# Altium PCB Rackmount_DSP.PcbDoc (part 20 of 24)
Units mil, origin at the board's own origin, x right, y up, seen from the top; angles counter-clockwise.
Board outline 10629.92 x 8267.72 mil, 4 copper layers (Top Layer, Mid Layer 1, Mid Layer 2, Bottom Layer), stack 36.2 mil thick; 4500 components, 1565 nets, 9765 pads, 3289 vias.
Unrouted connection lines stored in the file: 1.
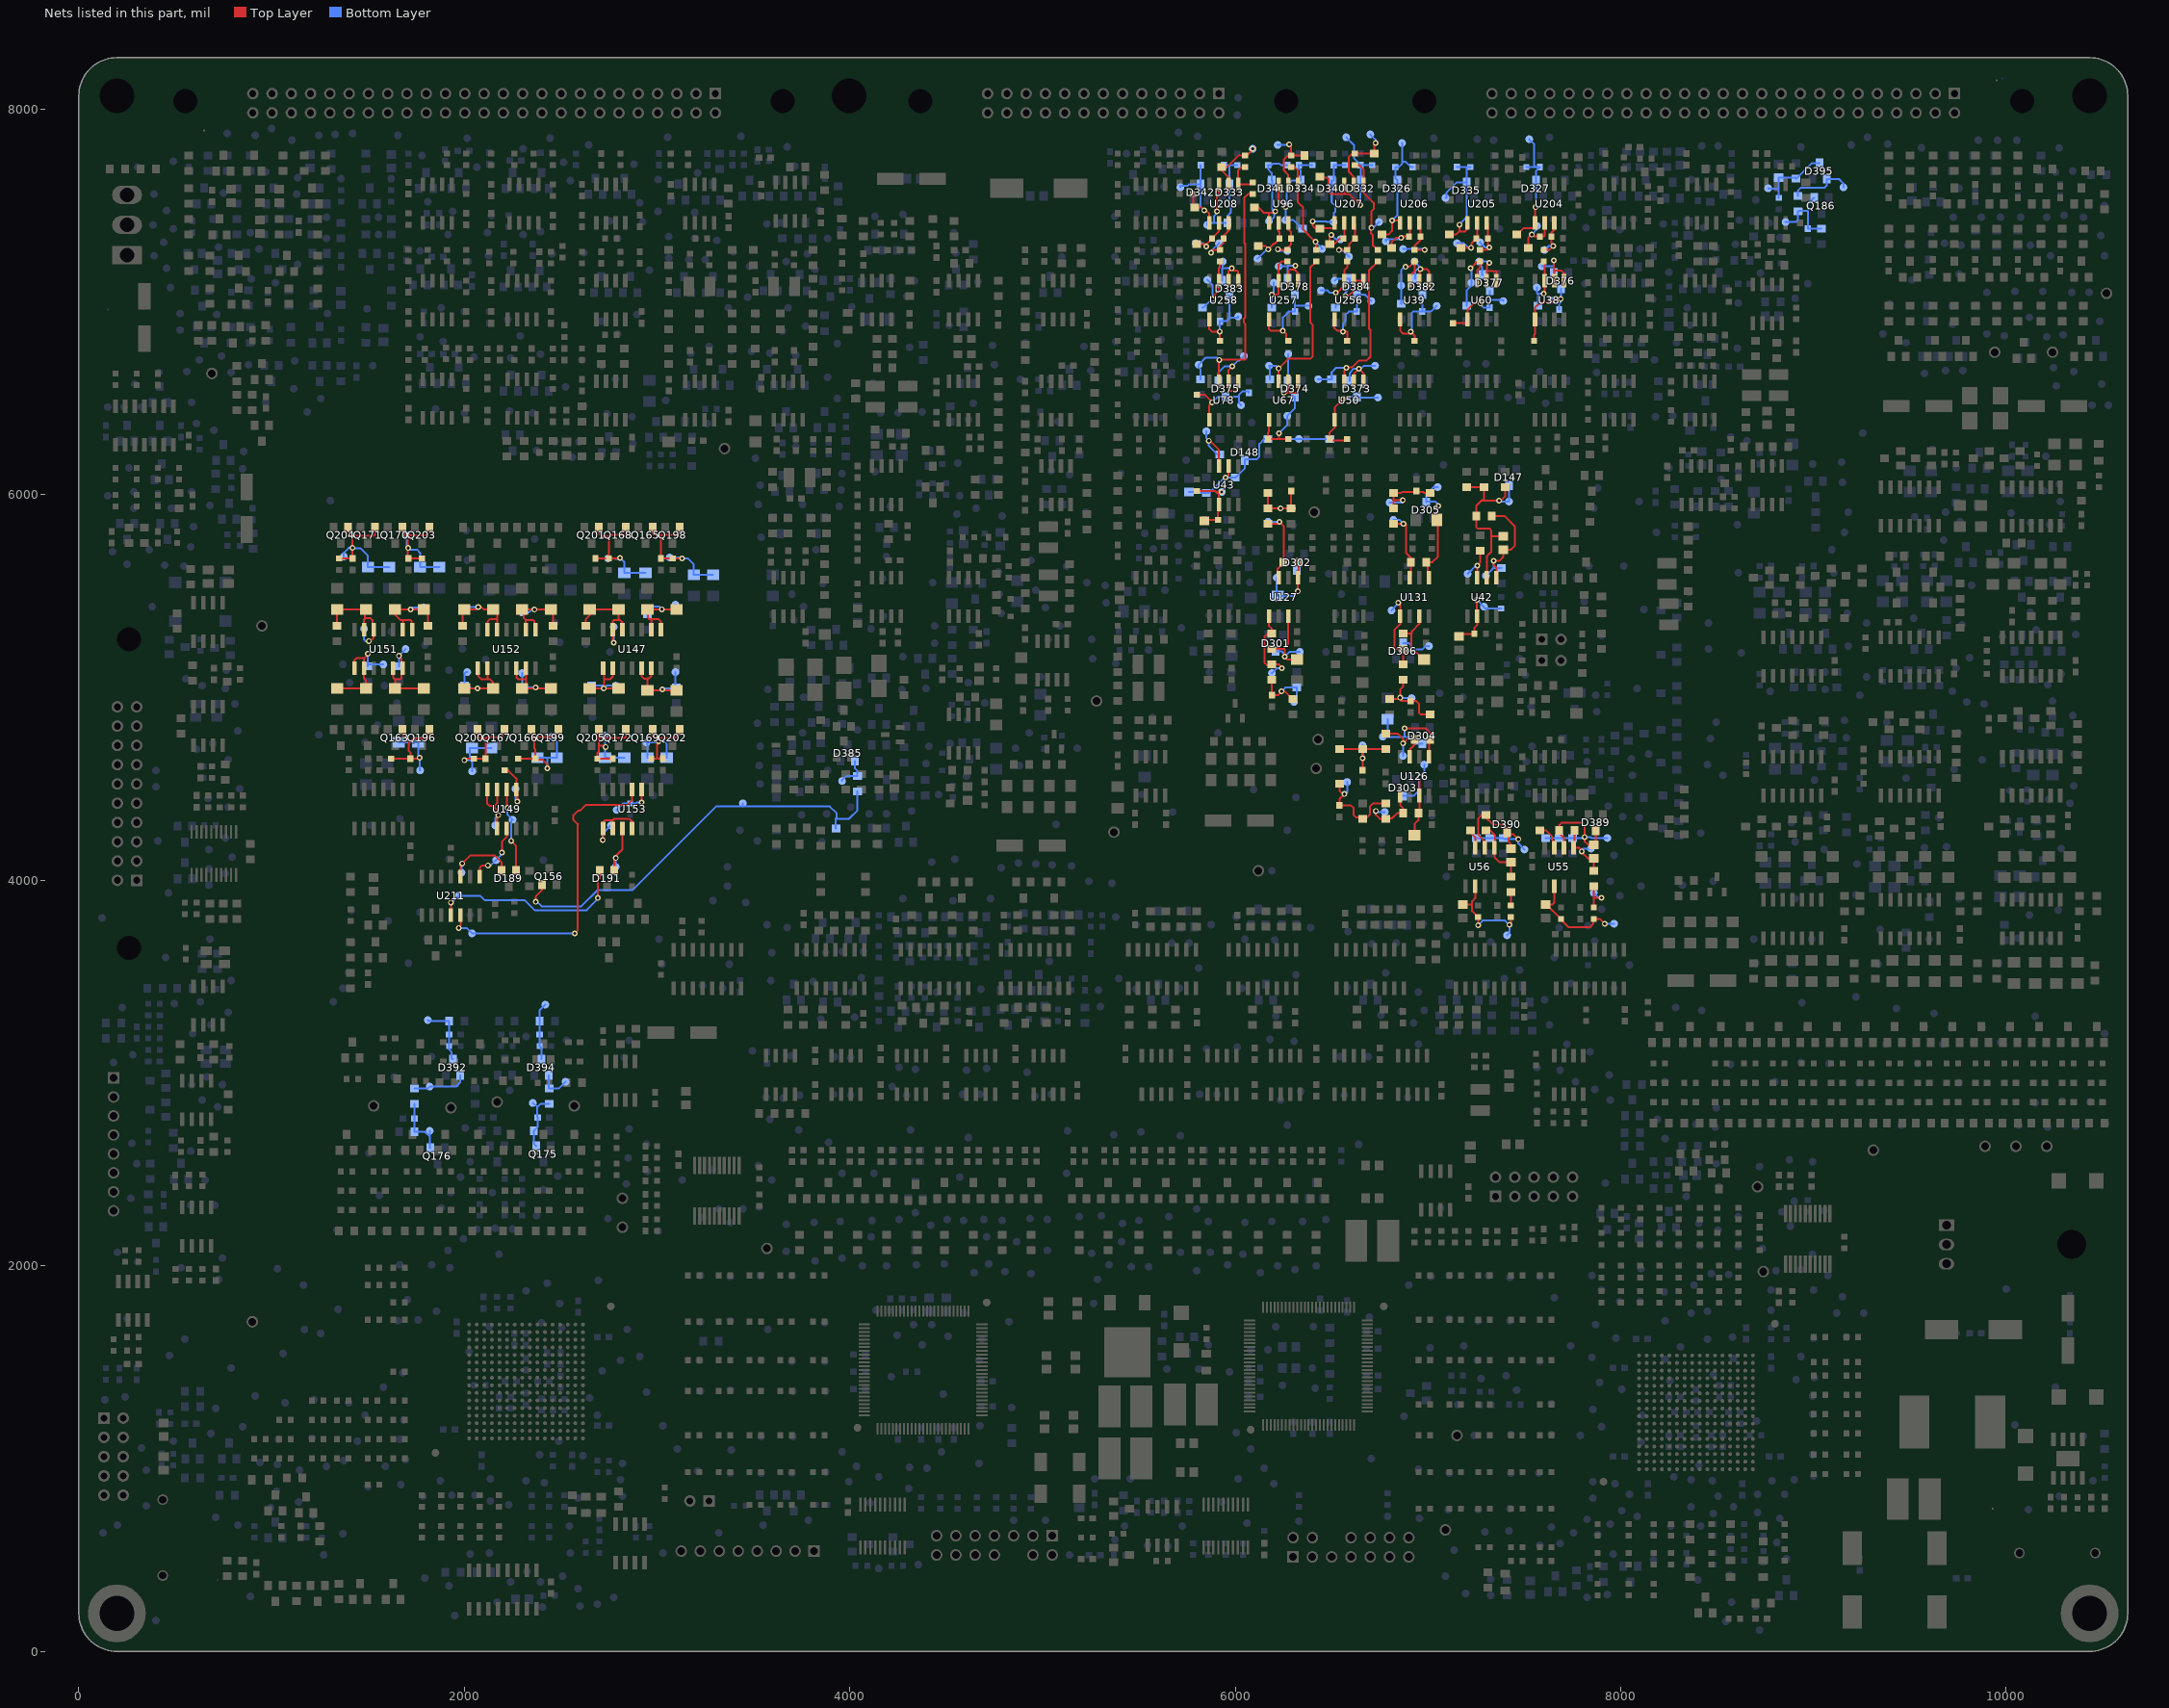
[diagram p22: the nets of this part, all layers, seen from the top]

## Via types
v1: diameter 30, hole 16, Top Layer to Bottom Layer, 3143 vias
v2: diameter 22, hole 12, Top Layer to Bottom Layer, 146 vias

## Nets (pads, with @x,y where several pads share a name; then routed paths per layer and width w, separated by ;. In a path a pad name is that pad's centre, name@x,y a point inside that pad or via, vN(x,y) a via of type N, cw(c..) or ccw(c..) an arc to the next point about the centre after c; other vN are vias at no path point) (continued)
XSIG200397: C1091.2 D332.3 R2237.2 R2596.1 TP1161.1 U207.3 | length 801.7
  Top Layer w10: R2596.1@6440,7650 6440,7645.46 6477.5,7645.46 6485.01,7637.96 6485.01,7572.28 6497.29,7560 6565,7560 ; U207.3@6565,7610 6565,7560 ; v1(6647.5,7504.34) 6591.84,7560 6565,7560
  Bottom Layer w10: TP1161.1@6575,7855 6617.24,7812.76 6617.24,7744.26 6650,7711.5 C1091.2@6650,7710 ; v1(6647.5,7504.34) 6647.5,7562.42 6650,7564.92 D332.3@6650,7631.5 C1091.2@6650,7710 ; R2237.2@6710,7710 C1091.2@6650,7710
XSIG200398: R2246.2 R2247.1 TP1162.1 U207.1 | length 567.7
  Top Layer w10: R2246.2@6620,7710 6643.67,7710 6665,7688.67 U207.1@6665,7610 6665,7566.95 6717.5,7514.45 6717.5,7482.46 6706.81,7471.77 v1(6706.81,7384.95) 6703.97,7384.95 6703.97,7356.22 6713.39,7346.79 6713.39,7295.61 6739,7270 R2247.1@6740,7270
  Bottom Layer w10: v1(6706.81,7384.95) 6714.95,7384.95 TP1162.1@6745,7415
XSIG200405: R2246.1 R2330.1 TP1163.1 U207.2 | length 407.4
  Top Layer w10: U207.2@6615,7610 6614.2,7610 6614.2,7650.23 6589,7675.43 6589,7753.72 6605.28,7770 R2246.1@6620,7770 R2330.1@6720,7770 6720,7817.12 v1(6727.76,7824.88)
  Bottom Layer w10: TP1163.1@6700,7870 6727.76,7842.24 v1(6727.76,7824.88)
XSIG200409: D373.1 TP1164.1 U50.1 U50.2 | length 338.1
  Top Layer w10: U50.2@6615,6590 6615,6628.16 v1(6641.42,6654.58) 6665,6631 U50.1@6665,6590
  Bottom Layer w10: D373.1@6592.5,6591.5 6592.5,6631.11 6615.97,6654.58 v1(6641.42,6654.58) 6651.24,6654.58 6666.66,6670 TP1164.1@6725,6670
XSIG200411: R2247.2 R2384.2 TP1165.1 U50.3 | length 932.3
  Top Layer w10: U50.3@6565,6590 6565,6648.18 v1(6576.33,6659.51) 6576.33,6661.92 6606.33,6661.92 6640.45,6696.04 6680.75,6696.04 6701,6716.29 6701,6854.36 6693.7,6861.66 6693.7,7164.7 6739,7210 R2247.2@6740,7210
  Bottom Layer w10: TP1165.1@6430,6600 R2384.2@6500,6600 6500,6635.84 6523.67,6659.51 v1(6576.33,6659.51)
XSIG200422: C1092.2 D334.3 R2245.2 R2595.1 TP1166.1 U96.3 | length 662.1
  Top Layer w10: U96.3@6225,7610 6225,7530.54 6260.86,7494.69 6260.86,7494.31 v1(6260.31,7494.31)
  Bottom Layer w10: TP1166.1@6260,7425 TP1166.1@6261.05,7425 ; v1(6260.31,7494.31) v1@6261.05,7494.31 ; R2595.1@6350,7380 6347.5,7380 6302.5,7425 TP1166.1@6261.05,7425 ; R2245.2@6400,7710 C1092.2@6330,7710 6330,7693.51 6340,7683.51 D334.3@6340,7631.5 6295.54,7631.5 6267.5,7603.46 6267.5,7494.31 v1@6261.05,7494.31 ; TP1166.1@6261.05,7425 v1@6261.05,7494.31
XSIG200423: R2262.2 R2263.1 TP1919.1 U96.1 | length 547.6
  Top Layer w10: R2262.2@6290,7700 6308.57,7700 6325,7683.57 U96.1@6325,7610 6325,7517.7 6351.53,7491.17 6351.53,7376.47 v1(6415.64,7312.36) 6420,7308 R2263.1@6420,7270
  Bottom Layer w10: v1(6415.64,7312.36) 6451.5,7276.5 TP1919.1@6450,7275
XSIG200430: R2262.1 R2331.1 TP1920.1 U96.2 | length 379.7
  Top Layer w10: U96.2@6275,7610 6275,7660 6251.57,7683.43 6251.57,7739.9 6271.66,7760 R2262.1@6290,7760 ; v1(6280.11,7817.91) 6290,7808.02 R2262.1@6290,7760 ; R2331.1@6360,7760 R2262.1@6290,7760
  Bottom Layer w10: TP1920.1@6220,7815 6277.19,7815 v1(6280.11,7817.91)
XSIG200434: D374.1 TP1169.1 U67.1 U67.2 | length 403.8
  Top Layer w10: v1(6252.55,6529.74) v1@6264.1,6529.74 ; U67.2@6275,6590 6275,6540.64 v1@6264.1,6529.74 ; U67.1@6325,6590 6325,6537.78 6316.95,6529.74 v1@6264.1,6529.74
  Bottom Layer w10: v1(6252.55,6529.74) 6252.55,6535.04 6272.5,6554.99 D374.1@6272.5,6591.5 6275,6591.5 TP1169.1@6275,6730
XSIG200436: R2263.2 R2395.2 TP1170.1 U67.3 | length 904.8
  Top Layer w10: U67.3@6225,6590 v1(6225,6655.3) 6277.2,6707.5 6392.21,6707.5 6401,6716.29 6401,6882.38 6389,6894.38 6389,7180 6419,7210 R2263.2@6420,7210
  Bottom Layer w10: TP1170.1@6175,6670 TP1170.1@6180,6670 ; R2395.2@6180,6600 TP1170.1@6180,6670 ; v1(6225,6655.3) 6210.3,6670 TP1170.1@6180,6670
XSIG200447: C1093.2 D333.3 R2244.2 R2602.1 TP60.1 U208.3 | length 704.8
  Top Layer w10: v1(5905.57,7470.09) 5905.57,7550.57 5915,7560 U208.3@5915,7610
  Bottom Layer w10: TP60.1@5855,7400 5855,7410 5888.25,7410 ; v1(5905.57,7470.09) 5905.57,7462.3 5888.25,7444.98 5888.25,7410 ; C1093.2@5940,7710 5970,7710 ; R2244.2@6010,7710 5970,7710 ; 5888.25,7410 R2602.1@5960,7410 5960,7447.72 5975.57,7463.28 5975.57,7491.93 5970,7497.5 D333.3@5970,7611.5 5970,7710
XSIG200448: R2260.2 R2261.1 U208.1 | length 194.8
  Top Layer w10: R2260.2@6050,7700 6030.91,7700 6015,7684.09 U208.1@6015,7610 6079,7610 6089,7620 R2261.1@6090,7620
XSIG200455: R2260.1 R2332.1 TP1750.1 U208.2 | length 308.5
  Top Layer w10: R2332.1@5930,7700 R2332.1@5930.11,7700 ; U208.2@5965,7610 5966.09,7610 5966.09,7646.41 5930.11,7682.39 R2332.1@5930.11,7700 ; v1(6090,7795) 6088.73,7795 6088.73,7789.68 6059.05,7760 R2260.1@6050,7760 6015.61,7760 5955.61,7700 R2332.1@5930.11,7700
XSIG200459: D375.1 TP1173.1 U78.1 U78.2 | length 436
  Top Layer w10: v1(5983.57,6665.82) 5965,6647.24 U78.2@5965,6590 5965,6545.77 5972.43,6538.34 6001.88,6538.34 6015,6551.46 U78.1@6015,6590
  Bottom Layer w10: D375.1@5912.5,6591.5 5912.5,6635.06 5943.26,6665.82 v1(5983.57,6665.82) 6013.01,6695.25 6020.25,6695.25 TP1173.1@6045,6720
XSIG200461: R2261.2 R2394.2 TP1174.1 U78.3 | length 1356.3
  Top Layer w10: U78.3@5915,6590 5915,6690.02 v1@5920.3,6690.02 ; v1(5917.37,6700) 5917.37,6692.94 v1@5920.3,6690.02 ; R2261.2@6090,7560 6065.58,7560 6047.69,7542.12 6047.69,7306.31 6051,7303.01 6051,6918.82 6043.42,6911.24 6043.42,6894.67 6051,6887.09 6051,6701.66 5931.94,6701.66 v1@5920.3,6690.02
  Bottom Layer w10: R2394.2@5820,6600 5820,6650.01 5810,6660.01 TP1174.1@5810,6675 5846.51,6711.51 5905.87,6711.51 v1(5917.37,6700)
XSIG200480: C1065.1 D373.3 R2041.1 TP1175.1 U50.5 | length 521.8
  Top Layer w10: v1(6558.58,6496.79) 6515,6453.21 U50.5@6515,6390 6515,6347.5 6490,6322.5 C1065.1@6490,6290 6490,6288.5 6495.68,6282.82 6571.82,6282.82 6579,6290 R2041.1@6580,6290
  Bottom Layer w10: v1(6558.58,6496.79) 6588.58,6496.79 6600.29,6508.5 D373.3@6630,6508.5 6630,6505 TP1175.1@6740,6505
XSIG200487: C1066.1 D374.3 R2042.1 TP59.1 U67.5 | length 459.9
  Top Layer w10: U67.5@6175,6390 6175,6327.5 6170,6322.5 C1066.1@6170,6290 6227.04,6290 ; v1(6227.04,6320) 6227.04,6290 ; R2042.1@6274.92,6290 6227.04,6290
  Bottom Layer w10: v1(6227.04,6320) 6270,6362.96 TP59.1@6270,6410 6310,6450 D374.3@6310,6508.5
XSIG200493: C1067.1 D375.3 R2043.1 TP58.1 U78.5 | length 465.7
  Top Layer w10: R2043.1@5800,6520 5840.02,6520 v1(5880.01,6480.01) 5865,6465 U78.5@5865,6390
  Bottom Layer w10: v1(5880.01,6480.01) 5908.5,6508.5 D375.3@5950,6508.5 6020,6508.5 ; TP58.1@6030,6465 6020,6475 6020,6508.5 ; C1067.1@6070,6530 6070,6535.8 6036.47,6535.8 6020,6519.32 6020,6508.5
XSIG210102: C794.1 R1155.2 R1252.1 R1682.2 TP1176.1 | length 350.1
  Top Layer w10: R1682.2@6170,6010 R1252.1@6170,5930 v1(6234.89,5930) R1155.2@6290,5930 C794.1@6290,6020
  Bottom Layer w10: v1(6234.89,5930) TP1176.1@6295,5930
XSIG210109: R1252.2 R1652.1 TP1177.1 U127.3 | length 437.8
  Top Layer w10: R1252.2@6170,5850 6218.4,5850 v1(6228.4,5860) 6252.06,5836.34 6252.06,5650 R1652.1@6250,5650 6250,5647.5 6219.39,5616.89 6219.39,5575.61 U127.3@6225,5570
  Bottom Layer w10: TP1177.1@6170,5860 v1(6228.4,5860)
XSIG210110: C795.1 R1159.2 R1253.1 R1683.2 TP1178.1 | length 384.9
  Top Layer w10: R1253.1@6190,5040 C795.1@6190,4960 6221,4960 6240.01,4979.01 v1(6240.01,4980.01) 6257.49,4980.01 6297.5,4940 R1683.2@6300,4940
  Bottom Layer w10: v1(6240.01,4980.01) 6260,5000 R1159.2@6320,5000 6320,4940 TP1178.1@6305,4925
XSIG210116: R1253.2 R1653.1 TP1179.1 U127.5 | length 446.8
  Top Layer w10: U127.5@6175,5370 6175,5320 6190,5305 R1653.1@6190,5280 6168.25,5280 6152.5,5264.25 6152.5,5127.82 6164.34,5115.98 6190,5115.98 R1253.2@6190,5120 6226.68,5120 6240.9,5105.78 v1(6240.9,5100.17)
  Bottom Layer w10: TP1179.1@6190,5075 6215.17,5100.17 v1(6240.9,5100.17)
XSIG210137: D302.3 R1445.1 R1652.2 TP57.1 U127.1 | length 479
  Top Layer w10: v1(6325,5499.39) U127.1@6325,5570 6330,5575 R1652.2@6330,5650
  Bottom Layer w10: TP57.1@6215,5570 6215,5501.05 6220,5501.05 R1445.1@6220,5475 6300.61,5475 v1(6325,5499.39) 6325,5603.5 D302.3@6320,5608.5
XSIG210138: D301.3 R1446.1 R1653.2 TP1180.1 U127.7 | length 509.2
  Top Layer w10: R1653.2@6190,5200 6248.1,5200 ; U127.7@6275,5370 6275,5226.9 6248.1,5200 ; R1446.1@6320,5145 6271.41,5145 v1(6256.23,5160.17) 6256.23,5197.23 6253.46,5200 6248.1,5200
  Bottom Layer w10: D301.3@6210,5188.5 6239.04,5188.5 6256.23,5171.31 v1(6256.23,5160.17) 6281.06,5185 TP1180.1@6335,5185
XSIG210196: C1094.2 D327.3 R2238.2 R2605.1 TP1181.1 U204.5 | length 670.2
  Top Layer w10: R2605.1@7460,7350 7462.5,7350 7496.06,7383.56 7555,7383.56 U204.5@7555,7410 7555,7487.34 7560,7492.34 v1(7557.81,7492.34)
  Bottom Layer w10: R2238.2@7510,7700 7561.51,7700 ; TP1181.1@7525,7845 7549,7821 7549,7712.51 7561.51,7700 ; v1(7557.81,7492.34) 7560,7492.34 D327.3@7560,7631.5 7560,7678.5 7580,7698.5 C1094.2@7580,7700 7561.51,7700
XSIG210197: R2248.2 R2249.1 TP1182.1 U204.7 | length 240.1
  Top Layer w10: R2249.1@7600,7270 7629.12,7270 v1(7649.24,7290.11) 7640,7299.35 R2248.2@7640,7340 7640,7359.62 7655,7374.62 U204.7@7655,7410
  Bottom Layer w10: TP1182.1@7605,7270 7625.11,7290.11 v1(7649.24,7290.11)
XSIG210205: R2248.1 R2324.1 TP1183.1 U204.6 | length 271.4
  Top Layer w10: R2324.1@7520,7280 7520,7331.53 v1(7538.47,7350) 7548.47,7340 R2248.1@7580,7340 7600,7340 7605,7345 U204.6@7605,7410
  Bottom Layer w10: v1(7538.47,7350) 7565,7376.53 TP1183.1@7565,7395
XSIG210210: D376.1 TP1184.1 U38.1 U38.2 | length 331.4
  Top Layer w10: v1(7652.5,7216.04) 7652.5,7163.77 7655,7163.77 ; U38.2@7655,7110 7655,7163.77 ; U38.1@7705,7110 7705,7150.23 7691.46,7163.77 7655,7163.77
  Bottom Layer w10: TP1184.1@7590,7185 7652.5,7185 ; D376.1@7652.5,7151.5 7652.5,7185 ; v1(7652.5,7216.04) 7652.5,7185
XSIG210212: R2249.2 R2385.2 TP1185.1 U38.3 | length 299.7
  Top Layer w10: R2249.2@7600,7210 7601.76,7210 7605,7206.76 U38.3@7605,7110 7605,7060 7600.68,7055.68 v1(7600.68,7043.2)
  Bottom Layer w10: TP1185.1@7565,7075 7565,7047.5 7570,7042.5 ; R2385.2@7570,6980 7570,7042.5 ; v1(7600.68,7043.2) 7570.7,7043.2 7570,7042.5
XSIG210214: C1068.1 D376.3 R2404.1 TP1186.1 U38.5 | length 489.7
  Top Layer w10: R2404.1@7550,6800 7550,6830 7555,6835 U38.5@7555,6910 7555,6971.11 7583.59,6999.7 7644.7,6999.7 7661.84,7016.84 v1(7688.57,7016.84)
  Bottom Layer w10: TP1186.1@7640,7010 7681.73,7010 v1(7688.57,7016.84) ; C1068.1@7680,6960 7680,6992.5 7688.57,7001.07 v1(7688.57,7016.84) ; D376.3@7690,7068.5 7690,7018.27 v1(7688.57,7016.84)
XSIG210283: R2250.2 R2251.1 TP1188.1 U205.7 | length 252
  Top Layer w10: R2251.1@7270,7270 7302.86,7270 v1@7313.51,7280.64 ; U205.7@7305,7410 7310,7405 R2250.2@7310,7330 7310,7284.15 v1@7313.51,7280.64 ; v1(7317.61,7283.31) 7317.61,7276.54 v1@7313.51,7280.64
  Bottom Layer w10: TP1188.1@7270,7310 7296.69,7283.31 v1(7317.61,7283.31)
XSIG210285: R2250.1 R2325.1 TP1189.1 U205.6 | length 277.1
  Top Layer w10: R2325.1@7170,7280 7220.72,7280 v1(7222.6,7281.88) 7224.39,7283.67 7224.39,7303.39 7250,7329 R2250.1@7250,7330 7255,7335 U205.6@7255,7410
  Bottom Layer w10: TP1189.1@7150,7305 7185,7305 7193.12,7296.88 7195.17,7296.88 7210.16,7281.88 v1(7222.6,7281.88)
XSIG210288: D377.1 TP1190.1 U60.1 U60.2 | length 330.5
  Top Layer w10: U60.2@7305,7110 7305,7160 ; v1(7317.55,7203.95) 7305,7191.4 7305,7160 ; U60.1@7355,7110 7355,7160 7305,7160
  Bottom Layer w10: D377.1@7282.5,7141.5 7281.58,7141.5 7281.58,7182.73 7265,7199.31 TP1190.1@7265,7210 7311.5,7210 v1(7317.55,7203.95)
XSIG210289: R2251.2 R2386.2 TP62.1 U60.3 | length 380.3
  Top Layer w10: v1(7220.82,7175.26) 7255.55,7210 R2251.2@7270,7210 7270,7180 7255,7165 U60.3@7255,7110
  Bottom Layer w10: R2386.2@7200,6980 7200,7060.62 7225,7085.62 TP62.1@7225,7100 7225.34,7100 7225.34,7175.26 v1(7220.82,7175.26)
XSIG210302: C1096.2 D326.3 R2240.2 R2603.1 TP1191.1 U206.5 | length 681.2
  Top Layer w10: R2603.1@6760,7350 6793.86,7350 6812.71,7368.85 v1@6812.71,7422.81 ; v1(6812.71,7423.27) v1@6812.71,7422.81 ; U206.5@6855,7410 6855,7422.81 v1@6812.71,7422.81
  Bottom Layer w10: v1(6812.71,7423.27) 6841.88,7452.43 6841.88,7631.5 D326.3@6840,7631.5 6840,7632.94 6830,7642.94 R2240.2@6830,7700 6847.34,7700 6865,7717.66 6865,7728.11 ; TP1191.1@6865,7825 6865,7728.11 ; C1096.2@6920,7700 6911.1,7700 6883,7728.11 6865,7728.11
XSIG210304: R2254.2 R2255.1 TP1192.1 U206.7 | length 323.3
  Top Layer w10: U206.7@6955,7410 6955,7376 6960,7371 R2254.2@6960,7340 6960,7320.7 6930,7290.7 R2255.1@6930,7270 6930.79,7270.79 v1(6982.12,7270.79)
  Bottom Layer w10: TP1192.1@6870,7275 6982.12,7275 v1(6982.12,7270.79)
XSIG210306: R2254.1 R2326.1 TP1193.1 U206.6 | length 304.7
  Top Layer w10: R2326.1@6810,7280 6810,7309.01 6834.08,7333.08 v1(6859.76,7333.08) 6866.68,7340 R2254.1@6900,7340 6905,7340 U206.6@6905,7410
  Bottom Layer w10: TP1193.1@6780,7315 6780,7324.76 6859.76,7324.76 v1(6859.76,7333.08)
XSIG210309: D382.1 TP1194.1 U39.1 U39.2 | length 285.7
  Top Layer w10: U39.2@6955,7110 6955,7168.16 6957.16,7170.32 v1(6960,7170.32) 6994.68,7170.32 7005,7160 U39.1@7005,7110
  Bottom Layer w10: TP1194.1@6930,7210 6960,7180 v1(6960,7170.32) 6942.9,7170.32 6932.5,7159.92 D382.1@6932.5,7121.5
XSIG210310: R2255.2 R2387.2 TP61.1 U39.3 | length 374.4
  Top Layer w10: v1(6883.68,7182.57) 6901.57,7182.57 6929,7210 R2255.2@6930,7210 6930,7158.5 6905,7133.5 U39.3@6905,7110
  Bottom Layer w10: R2387.2@6860,6990 TP61.1@6860,7085 6860,7165.76 6876.81,7182.57 v1(6883.68,7182.57)
XSIG210323: C1070.1 D382.3 R2406.1 TP1195.1 U39.5 | length 531
  Top Layer w10: U39.5@6855,6910 6855,6851.49 6870.13,6836.36 6910.06,6836.36 v1@6910.06,6848.19 ; v1(6910.06,6846.46) v1@6910.06,6848.19 ; R2406.1@6930,6800 6930,6826.18 6919.82,6836.36 6915.37,6836.36 6915.37,6848.19 v1@6910.06,6848.19
  Bottom Layer w10: v1(6910.06,6846.46) 6910.06,6848.19 6915.37,6848.19 6915.37,6943.27 6922.11,6950 C1070.1@6970,6950 ; D382.3@6970,7038.5 C1070.1@6970,6950 ; TP1195.1@7045,6980 7015,6950 C1070.1@6970,6950
XSIG210327: C1069.1 D377.3 R2405.1 TP1196.1 U60.5 | length 449.6
  Top Layer w10: R2405.1@7130,6890 7131,6890 7131.97,6890.97 7205,6890.97 U60.5@7205,6910 7205,6960 7237.72,6992.72 v1(7272.09,6992.72)
  Bottom Layer w10: v1(7272.09,6992.72) 7272.09,6986.91 7289,6970 C1069.1@7320,6970 7320,7010.35 ; D377.3@7320,7058.5 7320,7010.35 ; TP1196.1@7390,7005 7390,7010.35 7320,7010.35
XSIG210343: C1095.2 D335.3 R2239.2 R2604.1 TP1187.1 U205.5 | length 718.4
  Top Layer w10: R2604.1@7110,7350 7144.42,7350 7162.5,7368.08 ; v1(7162.5,7401.75) 7162.5,7368.08 ; U205.5@7205,7410 7205,7378.64 7192.45,7366.09 7162.5,7366.09 7162.5,7368.08
  Bottom Layer w10: TP1187.1@7090,7540 7094.63,7540 7094.63,7567.56 7148.57,7621.5 D335.3@7200,7621.5 ; C1095.2@7150,7700 7200,7700 ; v1(7162.5,7401.75) 7200,7439.25 D335.3@7200,7621.5 ; R2239.2@7220,7700 7200,7700 ; D335.3@7200,7621.5 7200,7700
XSIG210348: C1135.2 R2564.1 R2568.2 TP1693.1 U55.1 | length 347.9
  Top Layer w10: U55.1@7755,4170 U55.1@7760,4170 ; R2568.2@7760,4260 U55.1@7760,4170 ; R2564.1@7860,4050 C1135.2@7860,4115 7828.56,4115 7797.5,4146.06 v1(7797.5,4150.11) 7797.15,4150.46 7797.15,4156.48 7783.63,4170 U55.1@7760,4170
  Bottom Layer w10: v1(7797.5,4150.11) 7802.9,4155.51 7802.9,4165 TP1693.1@7845,4165
XSIG210350: R2551.1 U55.3 | length 139.2
  Top Layer w10: R2551.1@7580,4260 7610.98,4260 7643.46,4227.52 7643.46,4211.22 7655,4199.67 U55.3@7655,4170
XSIG210358: C1133.2 R2547.2 R2548.1 TP1695.1 U55.6 | length 580
  Top Layer w10: C1133.2@7610,3875 C1133.2@7612.75,3875 ; U55.6@7655,3970 7655,3884.62 7645.38,3875 C1133.2@7612.75,3875 ; v1(7916.39,3775) 7891.39,3800 R2547.2@7860,3800 7858.46,3800 7858.46,3775.45 7840.06,3757.05 7729.46,3757.05 7690,3796.51 R2548.1@7690,3800 7687.75,3800 C1133.2@7612.75,3875
  Bottom Layer w10: v1(7916.39,3775) TP1695.1@7965,3775
XSIG210364: C1135.1 D389.3 R2568.1 R2569.2 R2572.2 R2573.2 TP1696.1 U55.2 | length 808.5
  Top Layer w10: U55.2@7705,4170 7705,4220 7680,4245 R2568.1@7680,4260 7680,4285.72 7692.85,4298.58 7798.79,4298.58 7812.09,4285.28 v1@7812.09,4224.88 ; v1(7812.4,4224.88) v1@7812.09,4224.88 ; D389.3@7870,4258.5 7870,4195 C1135.1@7860,4185 7830.33,4185 7812.09,4203.24 v1@7812.09,4224.88
  Bottom Layer w10: R2572.2@7610,4220 R2569.2@7680,4220 R2573.2@7750,4220 7807.52,4220 v1(7812.4,4224.88) 7842.4,4224.88 7847.28,4220 TP1696.1@7930,4220
XSIG210367: R2547.1 R2564.2 TP1697.1 | length 199.6
  Top Layer w10: R2547.1@7860,3860 7860,3909.76 ; R2564.2@7860,3970 7860,3909.76 ; v1(7899.17,3908.8) 7860.96,3908.8 7860,3909.76
  Bottom Layer w10: TP1697.1@7860,3935 7886.2,3908.8 v1(7899.17,3908.8)
XSIG220001: C797.1 R1163.2 R1254.1 R1684.2 TP1197.1 | length 416.3
  Top Layer w10: R1163.2@6540,4680 R1684.2@6660,4680 ; C797.1@6660,4570 v1(6660,4633.7) R1684.2@6660,4680 ; R1254.1@6780,4680 R1684.2@6660,4680
  Bottom Layer w10: v1(6660,4633.7) TP1197.1@6660,4700
XSIG220004: R1254.2 R1654.1 TP1198.1 U126.3 | length 358.5
  Top Layer w10: R1254.2@6780,4760 6844.32,4760 6870,4734.32 v1(6870,4710.34) 6889.66,4730 R1654.1@6930,4730 6930,4703.59 6905,4678.59 U126.3@6905,4640
  Bottom Layer w10: TP1198.1@6870,4645 v1(6870,4710.34)
XSIG220008: C796.1 R1165.2 R1255.1 R1685.2 TP1199.1 | length 557.8
  Top Layer w10: R1685.2@6540,4500 6540,4465 6557.48,4447.52 v1(6566.4,4447.52) 6540,4421.11 C796.1@6540,4390 6598.44,4390 6614.29,4374.14 6614.29,4338.24 6625.35,4327.19 R1165.2@6660,4327.19 ; R1165.2@6660,4320 R1165.2@6660,4327.19 ; R1255.1@6780,4400 6715.02,4400 6699.44,4384.41 6699.44,4342.05 6684.58,4327.19 R1165.2@6660,4327.19
  Bottom Layer w10: v1(6566.4,4447.52) 6574.24,4455.35 6580,4455.35 TP1199.1@6580,4510
XSIG220010: R1255.2 R1647.1 TP1200.1 U126.5 | length 330.4
  Top Layer w10: v1(6729.49,4359.57) 6729.49,4339.95 6749.45,4320 R1255.2@6780,4320 6780,4321.8 6813.38,4321.8 6841.58,4350 R1647.1@6870,4350 6870,4375 6855,4390 U126.5@6855,4440
  Bottom Layer w10: v1(6729.49,4359.57) 6729.49,4363.02 6731.98,4363.02 6740,4355 TP1200.1@6775,4355
XSIG220124: C788.1 R1139.2 R1291.1 R1674.2 TP1201.1 | length 439.4
  Top Layer w10: R1674.2@6800,4940 v1@6852.15,4940 ; R1291.1@6870,5040 6870,5005 6854.82,4989.82 v1(6854.82,4947.46) 6852.15,4944.79 v1@6852.15,4940 ; C788.1@6910,4930 6862.15,4930 v1@6852.15,4940 ; C788.1@6910,4930 6939.3,4930.05 6954.44,4914.91 6954.44,4867.82 6962.26,4860 R1139.2@7010,4860
  Bottom Layer w10: v1(6854.82,4947.46) 6857.28,4945 TP1201.1@6915,4945
XSIG220126: R1291.2 R1648.1 TP1202.1 U131.5 | length 435.3
  Top Layer w10: v1(6844.97,5439.86) 6855,5429.83 U131.5@6855,5370 6855,5328.87 6825.06,5298.92 6825.06,5208.43 6832.5,5200.98 6870,5200.98 R1648.1@6870,5200 R1291.2@6870,5120
  Bottom Layer w10: TP1202.1@6810,5400 6838.18,5428.18 6838.18,5439.86 v1(6844.97,5439.86)
XSIG220129: C789.1 R1140.2 R1292.1 R1675.2 TP1203.1 | length 412.3
  Top Layer w10: R1292.1@6820,5930 6820,5968.1 ; v1(6869.49,5972.42) 6824.32,5972.42 6820,5968.1 ; C789.1@6940,6020 C789.1@6940,6015 ; R1140.2@7010,6010 6978.75,6010 6973.75,6015 C789.1@6940,6015 ; 6820,5968.1 R1675.2@6820,6010 6861.85,6010 6866.85,6015 C789.1@6940,6015
  Bottom Layer w10: TP1203.1@6800,5960 6869.49,5960 v1(6869.49,5972.42)
XSIG220131: R1292.2 R1649.1 TP1204.1 U131.3 | length 417.9
  Top Layer w10: R1292.2@6820,5850 6872.05,5850 v1(6872.12,5849.93) 6885.05,5849.93 6885.05,5699.96 6910,5675.01 R1649.1@6910,5650 6910,5575 U131.3@6905,5570
  Bottom Layer w10: TP1204.1@6820,5870 6852.05,5870 v1(6872.12,5849.93)
XSIG220135: D306.3 R1425.1 R1648.2 TP1205.1 U131.7 | length 488.7
  Top Layer w10: R1648.2@6870,5280 6914.55,5280 ; v1(6917.5,5198.82) v1@6917.5,5203.5 ; U131.7@6955,5370 6955,5330.84 6916.36,5292.2 6916.36,5281.8 6914.55,5280 ; R1425.1@6980,5145 6976,5145 v1@6917.5,5203.5 ; 6914.55,5280 6914.55,5207.16 6917.5,5204.21 v1@6917.5,5203.5
  Bottom Layer w10: D306.3@6870,5231.5 6899.22,5231.5 6909.61,5221.1 6909.61,5198.82 v1(6917.5,5198.82) 6971.68,5198.82 6987.86,5215 TP1205.1@7005,5215
XSIG220163: D304.3 R1447.1 R1654.2 TP84.1 U126.1 | length 635.3
  Top Layer w10: v1(6878.74,4788.51) 6986.72,4788.51 7015,4760.23 7015,4735 R1654.2@7010,4730 7005,4730 U126.1@7005,4640
  Bottom Layer w10: TP84.1@6765,4745 6773.46,4745 6775.86,4742.61 6790,4742.61 ; R1447.1@6790,4835 6790,4742.61 ; v1(6878.74,4788.51) 6878.74,4746.59 6882.73,4742.61 ; D304.3@6970,4708.5 6934.07,4708.5 6899.96,4742.61 6882.73,4742.61 ; 6790,4742.61 6882.73,4742.61
XSIG220165: D303.3 R1424.1 R1647.2 TP1206.1 U126.7 | length 562.5
  Top Layer w10: R1424.1@6930,4235 6930,4292.5 6950,4312.5 R1647.2@6950,4350 6955,4350 U126.7@6955,4440 6955,4535.62 v1(6957.77,4535.62)
  Bottom Layer w10: D303.3@6870,4438.5 6870,4439.95 6928.16,4439.95 6952.63,4464.42 6952.63,4535.62 v1@6953.73,4535.62 ; v1(6957.77,4535.62) v1@6953.73,4535.62 ; TP1206.1@6980,4600 6980,4565 6953.73,4538.73 v1@6953.73,4535.62
XSIG220179: D305.3 R1426.1 R1649.2 TP1207.1 U131.1 | length 629
  Top Layer w10: U131.1@7005,5570 6999.27,5570 6999.27,5640.73 R1649.2@6990,5650 6990,5650.35 7022.78,5650.35 7051,5678.56 7051,5870 R1426.1@7045,5870 7045,5933.79 v1(7053.77,5942.56)
  Bottom Layer w10: D305.3@6990,5961.5 D305.3@6990,5965.51 ; TP1207.1@7050,6040 7029.25,6040 6990,6000.75 D305.3@6990,5965.51 ; v1(7053.77,5942.56) 7053.77,5949.39 7037.65,5965.51 D305.3@6990,5965.51
XSIG220223: C1097.2 D340.3 R2232.2 R2608.1 TP1208.1 U207.5 | length 658.5
  Top Layer w10: v1(6401.53,7419.42) 6401.53,7395.48 6417.01,7380 R2608.1@6440,7380 6442.5,7380 6446.77,7384.27 6515,7384.27 U207.5@6515,7410
  Bottom Layer w10: v1(6401.53,7419.42) 6470.58,7419.42 6475,7415 TP1208.1@6510,7415 6510,7460.75 6519.4,7470.15 6519.4,7498.45 6500,7517.85 D340.3@6500,7631.5 6510,7631.5 C1097.2@6510,7710 R2232.2@6570,7710
XSIG220225: R2231.2 R2268.1 TP1209.1 U207.7 | length 274.6
  Top Layer w10: v1(6537.5,7270) R2268.1@6580,7270 6591,7270 6591,7300 6620,7329 R2231.2@6620,7330 6620,7405 U207.7@6615,7410
  Bottom Layer w10: v1(6537.5,7270) 6555,7270 TP1209.1@6590,7235
XSIG220227: R2231.1 R2333.1 TP1210.1 U207.6 | length 273.4
  Top Layer w10: v1(6497.88,7348.68) 6490,7340.8 R2333.1@6490,7300 6513.28,7300 6543.28,7330 R2231.1@6560,7330 6565,7335 U207.6@6565,7410
  Bottom Layer w10: v1(6497.88,7348.68) 6521.56,7325 TP1210.1@6545,7325
XSIG220231: R2268.2 R2388.2 TP1211.1 U256.3 | length 349.7
  Top Layer w10: v1(6520.61,7047.98) 6526.48,7047.98 6565,7086.5 U256.3@6565,7110 6565,7165 6580,7180 R2268.2@6580,7210
  Bottom Layer w10: TP1211.1@6445,7060 6480,7060 6480,7058.59 6490.61,7047.98 v1(6520.61,7047.98) 6520.61,7005.61 6520,7005 R2388.2@6520,6970
XSIG220242: C1098.2 D341.3 R2234.2 R2607.1 TP1212.1 U96.5 | length 610.8
  Top Layer w10: R2607.1@6100,7490 6100,7490.9 6121.07,7490.9 6148.88,7463.09 6171.91,7463.09 6175,7460 ; U96.5@6175,7410 6175,7460 ; v1(6207.45,7470) 6207.45,7462.45 6177.45,7462.45 6175,7460
  Bottom Layer w10: R2234.2@6170,7710 R2234.2@6170.48,7710 ; TP1212.1@6175,7420 6180,7420 6201.88,7441.88 v1@6201.88,7470 ; v1(6207.45,7470) v1@6201.88,7470 ; C1098.2@6270,7710 6236.99,7710 6228.77,7718.22 6195.19,7718.22 6186.96,7710 R2234.2@6170.48,7710 ; R2234.2@6170.48,7710 6170.48,7688.38 6188.86,7670 6188.86,7631.5 D341.3@6190,7631.5 6191.7,7631.5 6191.7,7480.18 v1@6201.88,7470
XSIG220243: R2233.2 R2269.1 TP1213.1 U96.7 | length 258.7
  Top Layer w10: v1(6220.65,7274.13) 6224.78,7270 R2269.1@6270,7270 6270,7279 6290,7299 R2233.2@6290,7330 6290,7361 6275,7376 U96.7@6275,7410
  Bottom Layer w10: v1(6220.65,7274.13) 6229.78,7265 TP1213.1@6270,7265
XSIG220246: R2233.1 R2334.1 TP1214.1 U96.6 | length 301.2
  Top Layer w10: R2334.1@6120,7290 6157.5,7290 6170.59,7276.91 v1(6170.59,7272.92) 6201.06,7303.39 6204.39,7303.39 6230,7329 R2233.1@6230,7330 6230,7361 6225,7366 U96.6@6225,7410
  Bottom Layer w10: TP1214.1@6115,7225 6162.92,7272.92 v1(6170.59,7272.92)
XSIG220250: D378.1 TP1215.1 U257.1 U257.2 | length 327.6
  Top Layer w10: U257.2@6275,7110 6276.12,7110 6276.12,7160.18 6283.19,7167.25 6308.99,7167.25 ; v1(6311,7188.45) 6310.19,7188.45 6308.99,7187.25 6308.99,7167.25 ; U257.1@6325,7110 6323.08,7110 6323.08,7153.15 6308.99,7167.25
  Bottom Layer w10: TP1215.1@6225,7185 6272.5,7185 ; D378.1@6272.5,7121.5 6272.5,7185 ; v1(6311,7188.45) 6272.5,7188.45 6272.5,7185
XSIG220252: R2269.2 R2389.2 TP1216.1 U257.3 | length 373.8
  Top Layer w10: v1(6190,7039.05) 6220,7039.05 6225,7044.05 U257.3@6225,7110 6225,7195.68 6239.32,7210 R2269.2@6270,7210
  Bottom Layer w10: R2389.2@6190,6970 v1(6190,7039.05) 6200,7049.05 TP1216.1@6200,7100
XSIG220263: C1099.2 D342.3 R2236.2 R2606.1 TP82.1 U208.5 | length 575.5
  Top Layer w10: R2236.2@5780,7560 5780,7555 5782.32,7552.68 5782.32,7490 R2606.1@5790,7490 5827.5,7490 5838.36,7479.14 v1(5838.36,7475.92) 5849.08,7475.92 5865,7460 U208.5@5865,7410
  Bottom Layer w10: TP82.1@5715,7595 5715,7601.85 5750.58,7601.85 5760.23,7611.5 D342.3@5820,7611.5 ; C1099.2@5820,7710 D342.3@5820,7611.5 ; v1(5838.36,7475.92) 5820,7494.27 D342.3@5820,7611.5
XSIG220264: R2235.2 R2270.1 TP1217.1 U208.7 | length 284.5
  Top Layer w10: v1(5873.8,7255.33) 5873.8,7262.93 5880.87,7270 R2270.1@5920,7270 5920,7289.14 5940,7309.14 R2235.2@5940,7330 5940,7345.26 5966.71,7371.97 5966.71,7410 U208.7@5965,7410
  Bottom Layer w10: v1(5873.8,7255.33) 5873.8,7263.8 TP1217.1@5915,7305
XSIG220267: R2235.1 R2335.1 TP1218.1 U208.6 | length 261.1
  Top Layer w10: R2335.1@5800,7300 5847.1,7300 v1@5849.71,7297.39 ; v1(5849.71,7288.41) v1@5849.71,7297.39 ; U208.6@5915,7410 5914.93,7410 5914.93,7365.93 5880,7331 R2235.1@5880,7330 5849.71,7299.71 v1@5849.71,7297.39
  Bottom Layer w10: TP1218.1@5795,7305 5833.13,7305 v1(5849.71,7288.41)
XSIG220271: D383.1 TP1219.1 U258.1 U258.2 | length 315.4
  Top Layer w10: U258.2@5965,7110 5965,7161.69 5967.83,7164.52 v1@5991.95,7164.52 ; v1(5981.5,7175) v1@5991.95,7164.52 ; U258.1@6015,7110 6015,7157.17 6007.65,7164.52 v1@5991.95,7164.52
  Bottom Layer w10: D383.1@5932.5,7111.5 5932.5,7175 5935,7175 ; TP1219.1@5935,7210 5935,7175 ; v1(5981.5,7175) 5935,7175
XSIG220273: R2270.2 R2390.2 TP1220.1 U258.3 | length 390.7
  Top Layer w10: v1(5880.71,7015.37) 5880.71,7025.71 5915,7060 U258.3@5915,7110 5915,7175 5920,7180 R2270.2@5920,7210
  Bottom Layer w10: R2390.2@5830,6970 5832.5,6970 5877.87,7015.37 v1(5880.71,7015.37) 5880.71,7089.29 TP1220.1@5855,7115
XSIG220275: C1073.1 D383.3 R2397.1 TP1221.1 U258.5 | length 429.9
  Top Layer w10: U258.5@5865,6910 5865,6860 5877.74,6847.26 v1(5920,6847.26) R2397.1@5920,6800
  Bottom Layer w10: v1(5920,6847.26) C1073.1@5920,6900 5951.84,6900 5970,6918.16 5970,6918.24 ; D383.3@5970,7028.5 5970,6918.24 ; TP1221.1@6015,6925 6015,6918.24 5970,6918.24
XSIG220292: C1072.1 D378.3 R2396.1 TP81.1 U257.5 | length 500.4
  Top Layer w10: U257.5@6175,6910 6175,6860 6184.76,6850.24 v1(6247.1,6850.24) 6248.59,6850.24 6263.92,6834.91 6263.92,6800 R2396.1@6274.92,6800
  Bottom Layer w10: v1(6247.1,6850.24) 6247.1,6920.69 6276.41,6950 C1072.1@6310,6950 6310,6951.3 6309.52,6951.3 6309.52,6980 ; D378.3@6310,7038.5 6310,6980.48 6309.52,6980 ; TP81.1@6380,6980 6309.52,6980
XSIG220298: C1071.1 D384.3 R2407.1 TP1222.1 U256.5 | length 511.1
  Top Layer w10: U256.5@6515,6910 6515,6887.57 6521.5,6881.07 6513.73,6881.07 6513.73,6865.83 6529.5,6850.06 6558.77,6850.06 v1@6559.16,6849.66 ; v1(6559.16,6847.01) v1@6559.16,6849.66 ; R2407.1@6580,6800 6580,6845.23 6575.57,6849.66 v1@6559.16,6849.66
  Bottom Layer w10: v1(6559.16,6847.01) 6559.16,6886.69 6570.28,6897.81 6570.28,6931.42 6588.86,6950 C1071.1@6630,6950 D384.3@6630,7038.5 6671.5,7038.5 TP1222.1@6705,7005
XSIG220299: D384.1 TP1223.1 U256.1 U256.2 | length 335.6
  Top Layer w10: v1(6571.49,7031.98) 6586.98,7031.98 6615,7060 U256.2@6615,7110 U256.1@6665,7110
  Bottom Layer w10: TP1223.1@6515,7110 6526.5,7121.5 D384.1@6592.5,7121.5 6592.5,7072.11 6571.49,7051.1 v1(6571.49,7031.98)
XSIG220306: R2552.1 U56.3 | length 100.4
  Top Layer w10: R2552.1@7220,4260 7220,4248 7245,4223 U56.3@7245,4170
XSIG220314: C1134.2 R2549.2 R2550.1 TP1698.1 U56.6 | length 557.7
  Top Layer w10: C1134.2@7180,3875 7229,3875 ; U56.6@7245,3970 7245,3907.21 7229,3891.21 7229,3875 ; v1(7259.37,3766.68) 7259.37,3779.37 7260,3780 R2550.1@7260,3810 7259,3810 7229,3840 7229,3875 ; v1(7421.76,3769.23) 7424.31,3771.78 7424.31,3774.31 7430,3780 R2549.2@7430,3810
  Bottom Layer w10: v1(7259.37,3766.68) 7284.04,3791.35 7399.64,3791.35 v1(7421.76,3769.23) 7421.76,3726.76 TP1698.1@7410,3715
XSIG220319: C1136.1 D390.3 R2566.2 R2567.2 R2570.1 R2571.2 TP1699.1 U56.2 | length 833.7
  Top Layer w10: U56.2@7295,4170 7295.05,4170 7295.05,4201.23 7259.28,4237.01 7259.28,4319.6 7279.68,4340 R2570.1@7300,4340 7300,4325.47 7336.17,4289.3 7393.36,4289.3 7410,4272.66 D390.3@7410,4248.5 7410,4235.78 D390.3@7412.26,4233.52 ; C1136.1@7430,4165 7430,4188.83 7417.83,4200.99 7417.83,4227.94 D390.3@7412.26,4233.52 ; v1(7468.63,4213.18) 7468.47,4213.18 7441.78,4239.88 7418.62,4239.88 D390.3@7412.26,4233.52
  Bottom Layer w10: R2571.2@7250,4220 R2567.2@7320,4220 R2566.2@7390,4220 7396.82,4213.18 v1(7468.63,4213.18) 7468.63,4191.37 TP1699.1@7500,4160
XSIG220324: C1136.2 R2565.1 R2570.2 U56.1 | length 343.7
  Top Layer w10: R2570.2@7300,4260 7320.78,4260 7346.77,4234.01 7346.77,4170 U56.1@7345,4170 7345,4120 7370,4095 C1136.2@7430,4095 R2565.1@7430,4020
XSIG220327: R2549.1 R2565.2 | length 70
  Top Layer w10: R2549.1@7430,3870 R2565.2@7430,3940
XSIG230007: R1121.2 R1867.2 R1906.2 TP1622.1 U152.8 U152.9 | length 524.4
  Top Layer w10: R1867.2@2000,4995 v1(2067.65,4995) R1906.2@2147.14,4995 ; U152.8@2070,5100 2070,5062.33 2090.22,5042.11 2120,5042.11 ; U152.9@2120,5100 2120,5042.11 ; R1906.2@2150,4995 R1906.2@2147.14,4995 ; 2120,5042.11 2134.03,5042.11 2147.14,5029 R1906.2@2147.14,4995
  Bottom Layer w10: TP1622.1@2015,5080 2008.41,5080 2000,5071.59 R1121.2@2000,5010 2022.65,5010 2037.65,4995 v1(2067.65,4995)
XSIG230013: R1122.2 R1868.2 R1907.2 TP1647.1 U152.12 U152.13 | length 507.1
  Top Layer w10: U152.12@2270,5100 2270,5053.21 2279.21,5044 2320,5044 ; R1907.2@2300,4995 R1907.2@2320,4995 ; U152.13@2320,5100 2320,5044 ; R1868.2@2450,4995 2369.44,4995 v1(2369.44,5000) 2364.44,4995 R1907.2@2320,4995 ; R1907.2@2320,4995 2320,5044
  Bottom Layer w10: TP1647.1@2300,5075 R1122.2@2300,5000 v1(2369.44,5000)
XSIG230019: R1123.2 R1869.2 R1908.2 TP1623.1 U147.5 U147.6 | length 588.2
  Top Layer w10: R1123.2@2630,5320 2630,5355 2650,5375 R1908.2@2650,5405 R1869.2@2800,5405 2800,5350 ; v1(2775,5233.58) 2775,5245 2770,5250 U147.6@2770,5300 2770,5345 2775,5350 2800,5350 ; U147.5@2820,5300 2820,5337.96 2807.96,5350 2800,5350
  Bottom Layer w10: v1(2775,5233.58) TP1623.1@2775,5315
XSIG230022: R1120.2 R1866.2 R1921.2 TP1650.1 U147.1 U147.2 | length 565.9
  Top Layer w10: R1866.2@2950,5405 R1866.2@2951.19,5405 ; U147.2@2970,5300 2970,5350 2976.3,5356.3 ; U147.1@3020,5300 3020.4,5300 3020.4,5341.05 3005.16,5356.3 2976.3,5356.3 ; v1(3025.01,5406.42) v1@3025.01,5405 ; R1921.2@3100,5405 v1@3025.01,5405 ; R1866.2@2951.19,5405 v1@3025.01,5405 ; R1866.2@2951.19,5405 2951.19,5363.32 2958.21,5356.3 2976.3,5356.3
  Bottom Layer w10: R1120.2@2950,5380 2950,5404.52 2966.67,5421.19 3009.91,5421.19 3024.67,5406.42 v1(3025.01,5406.42) 3073.09,5406.42 3095.83,5429.17 TP1650.1@3095,5430
XSIG230076: TP1624.1 U149.5 U149.6 U149.10 | length 394.8
  Top Layer w10: U149.6@2120,4470 2117.67,4470 2117.67,4398.91 2131.26,4385.32 2156.8,4385.32 ; U149.10@2170,4270 2170,4331.4 v1(2176.41,4337.81) 2175.12,4337.81 2175.12,4359.08 2156.8,4377.39 2156.8,4385.32 ; U149.5@2170,4470 2170,4400.59 2156.8,4387.39 2156.8,4385.32
  Bottom Layer w10: TP1624.1@2160,4285 2160,4321.4 v1(2176.41,4337.81)
XSIG230079: TP1625.1 U149.11 U211.1 | length 334.8
  Top Layer w10: U211.1@2080,4020 2080,4065.17 2092,4077.17 2122.06,4077.17 v1(2122.06,4077.76) ; v1(2194.45,4143.46) 2194.45,4199.68 2220,4225.23 U149.11@2220,4270
  Bottom Layer w10: v1(2122.06,4077.76) 2137.76,4077.76 TP1625.1@2165,4105 2194.45,4134.45 v1(2194.45,4143.46)
XSIG230081: D189.1 TP1626.1 U149.4 | length 446.9
  Top Layer w10: U149.4@2220,4470 2220,4375.54 v1(2224.26,4375.54) ; v1(2242.51,4205.21) 2267.5,4180.22 D189.1@2267.5,4051.5
  Bottom Layer w10: v1(2224.26,4375.54) 2224.26,4340.74 TP1626.1@2250,4315 2242.51,4307.51 v1(2242.51,4205.21)
XSIG230082: D189.2 TP1627.1 U211.3 | length 398.6
  Top Layer w10: U211.3@1980,4020 1980,4078.66 v1(1989.12,4087.78) 2030.04,4128.71 2158.41,4128.71 2192.5,4094.61 D189.2@2192.5,4051.5
  Bottom Layer w10: TP1627.1@1985,4040 1985,4083.66 v1(1989.12,4087.78)
XSIG230109: D385.1 R2414.1 TP1236.1 | length 176.9
  Bottom Layer w10: TP1236.1@3960,4515 3960,4519.88 3980.12,4540 R2414.1@4040,4540 4040,4567.5 4027.5,4580 D385.1@4027.5,4618.5
XSIG230110: Q156.1 R2414.2 R2415.1 TP1628.1 | length 2241.3
  Top Layer w10: v1(2369.74,3888.44) 2370.03,3888.44 2370.03,3916.43 2402.5,3948.9 Q156.1@2402.5,3978.5
  Bottom Layer w10: v1(2369.74,3888.44) 2370.03,3888.44 2370.03,3896.18 2401.04,3865.17 2606.48,3865.17 2690.06,3948.75 2871.75,3948.75 3306.47,4383.48 TP1628.1@3445,4383.48 ; TP1628.1@3445,4400 TP1628.1@3445,4383.48 ; R2415.1@3930,4270 3927.35,4270 3927.35,4321.01 3930,4321.01 ; R2414.2@4040,4460 4040,4362.91 3995.93,4318.84 3932.16,4318.84 3930,4321.01 ; TP1628.1@3445,4383.48 3896.02,4383.48 3930.24,4349.26 3930.24,4321.01 3930,4321.01
XSIG230129: C1116.2 Q175.1 R2542.1 R2555.1 TP1858.1 | length 316.9
  Bottom Layer w10: TP1858.1@2355,2845 2356.63,2845 2378.24,2823.39 ; Q175.1@2372.5,2621.5 2360,2634 R2555.1@2360,2700 2380,2720 C1116.2@2380,2770 2378.24,2771.76 2378.24,2823.39 ; R2542.1@2440,2840 2394.85,2840 2378.24,2823.39
XSIG230133: D394.1 R2542.2 TP1857.1 | length 169
  Bottom Layer w10: D394.1@2437.5,2988.5 2437.5,2922.5 R2542.2@2440,2920 2490,2920 TP1857.1@2525,2955
XSIG230140: C1139.1 D394.3 R2537.2 R2609.1 TP1856.1 | length 300.1
  Bottom Layer w10: D394.3@2400,3071.5 2400,3130 R2609.1@2390,3140 C1139.1@2390,3200 R2537.2@2390,3270 2390,3325 TP1856.1@2420,3355
XSIG230141: C1123.2 Q165.1 Q198.1 R2354.2 R2523.1 R2672.2 TP1703.1 | length 734.5
  Top Layer w10: Q165.1@2977.5,5831.5 2977.5,5800.19 2986.37,5791.32 3020,5791.32 ; Q198.1@3117.5,5831.5 3117.5,5802.19 3106.63,5791.32 3020,5791.32 ; v1(3129.26,5669.35) 3080.65,5669.35 R2523.1@3080,5670 C1123.2@3020,5670 3020,5791.32
  Bottom Layer w10: TP1703.1@3065,5675 3123.61,5675 v1(3129.26,5669.35) 3160.57,5669.35 3189.28,5640.64 3189.28,5585 R2672.2@3190,5585 R2354.2@3290,5585
XSIG230157: C1124.2 Q166.1 Q199.1 R2353.2 R2524.1 R2673.2 TP1855.1 | length 773.5
  Top Layer w10: R2524.1@2280,4630 C1124.2@2367.23,4630 ; Q166.1@2347.5,4781.5 2347.5,4753.15 2357.65,4743 2362.39,4743 ; v1(2431.11,4580.76) 2431.11,4600.4 2404.65,4626.86 2370,4626.86 C1124.2@2370,4630 C1124.2@2367.23,4630 ; Q199.1@2487.5,4781.5 2487.5,4763.55 2466.95,4743 2362.39,4743 ; 2362.39,4743 2362.39,4686.07 2367.23,4681.23 C1124.2@2367.23,4630
  Bottom Layer w10: R2353.2@2380,4635 2431.11,4635 ; v1(2431.11,4580.76) 2431.11,4635 ; TP1855.1@2455,4745 2480,4720 R2673.2@2480,4635 2431.11,4635
XSIG230161: C1125.2 Q167.1 Q200.1 R2352.2 R2525.1 R2667.2 TP1854.1 | length 695.3
  Top Layer w10: v1(2000.09,4622.71) 2007.38,4630 R2525.1@2050,4630 C1125.2@2110,4630 2110,4735.93 ; Q200.1@2067.5,4781.5 2067.5,4749.35 2080.92,4735.93 2110,4735.93 ; Q167.1@2207.5,4781.5 2207.5,4758.38 2192.12,4743 2117.07,4743 2110,4735.93
  Bottom Layer w10: v1(2000.09,4622.71) 2029.29,4622.71 ; TP1854.1@2040,4565 2040,4615.27 2032.56,4622.71 2029.29,4622.71 ; R2352.2@2140,4685 R2667.2@2040,4685 2029.29,4685 2029.29,4622.71
XSIG230165: C1126.2 Q168.1 Q201.1 R2351.2 R2526.1 R2670.2 TP1706.1 | length 725.1
  Top Layer w10: C1126.2@2680,5670 R2526.1@2750,5670 ; Q201.1@2697.5,5831.5 2697.5,5802.34 2715.38,5784.46 2750,5784.46 ; v1(2808.04,5672.27) 2808.04,5670 R2526.1@2750,5670 ; Q168.1@2837.5,5831.5 2837.5,5793 2831.9,5793 2830.43,5791.53 2757.07,5791.53 2750,5784.46 ; R2526.1@2750,5670 2750,5784.46
  Bottom Layer w10: TP1706.1@2745,5670 2780,5670 2781.66,5668.34 2804.12,5668.34 v1(2808.04,5672.27) 2830,5650.31 R2670.2@2830,5595 R2351.2@2940,5595
XSIG230181: R2644.1 TP1707.1 U149.3 | length 269.6
  Top Layer w10: R2644.1@2210,4570 2227.73,4570 2270,4527.73 U149.3@2270,4470 2274.4,4465.6 v1(2274.4,4408.16)
  Bottom Layer w10: TP1707.1@2265,4475 2265,4417.56 v1(2274.4,4408.16)
XSIG240012: R1129.2 R1875.2 R1913.2 TP1629.1 U151.1 U151.2 | length 554.4
  Top Layer w10: U151.2@1680,5300 1680,5351.08 ; U151.1@1730,5300 1726.39,5300 1726.39,5343.87 1719.18,5351.08 1680,5351.08 ; R1129.2@1810,5320 1810,5405 R1875.2@1790,5405 v1(1720.5,5405) R1913.2@1640,5405 1640,5378.58 1667.5,5351.08 1680,5351.08
  Bottom Layer w10: v1(1720.5,5405) 1730.5,5415 TP1629.1@1790,5415
XSIG240019: R1131.2 R1877.2 R1914.2 TP1630.1 U147.12 U147.13 | length 524.9
  Top Layer w10: U147.12@2920,5100 2919.19,5100 2919.19,5058.71 2931.21,5046.7 2950,5046.7 ; U147.13@2970,5100 2970,5058.75 2958.46,5047.21 2950,5047.21 2950,5046.7 ; R1877.2@3100,4985 3033.53,4985 v1(3027.93,4990.6) 3027.93,4985 R1914.2@2950,4985 2950,5046.7
  Bottom Layer w10: v1(3027.93,4990.6) 3027.93,4995.43 3091.02,4995.43 3095.58,5000 R1131.2@3100,5000 3100,5002.25 3095,5007.25 TP1630.1@3095,5080
XSIG240025: R1128.2 R1902.2 R1903.2 TP1649.1 U147.8 U147.9 | length 493.7
  Top Layer w10: R1903.2@2650,4995 v1(2723.54,4995) v1@2725.56,4995 ; U147.8@2720,5100 2720,5073.24 2725.56,5067.69 2725.56,5056.85 2725.56,5044.13 ; U147.9@2770,5100 2770,5056.56 2757.57,5044.13 2725.56,5044.13 ; R1902.2@2800,4995 v1@2725.56,4995 ; v1@2725.56,4995 2725.56,5044.13
  Bottom Layer w10: R1128.2@2660,5010 2718.67,5010 2723.54,5005.14 v1(2723.54,4995) 2738.54,5010 TP1649.1@2785,5010
XSIG240078: TP1631.1 U153.8 U153.9 U153.11 | length 429.9
  Top Layer w10: v1(2718.45,4208.33) 2718.45,4218.45 2720,4220 U153.8@2720,4270 2720,4302.69 2728.18,4310.87 2770,4310.87 ; U153.9@2770,4270 2770,4310.87 ; U153.11@2870,4270 2870,4306.49 2856.49,4320 2777.57,4320 2770,4312.43 2770,4310.87
  Bottom Layer w10: v1(2718.45,4208.33) 2718.45,4243.45 TP1631.1@2760,4285
XSIG240082: TP1632.1 U153.4 U211.12 | length 1704.1
  Top Layer w10: v1@1970.58,3752.75 1980,3762.17 U211.12@1980,3820 ; v1(2572.62,3725) 2588.16,3740.54 2588.16,4289.54 2589.1,4290.48 2566.39,4313.18 2566.39,4338.04 2589.39,4361.03 2599.92,4361.03 2630.65,4391.76 2846.23,4391.76 2869.01,4414.53 2869.01,4445.51 2870,4446.5 U153.4@2870,4470
  Bottom Layer w10: v1(1970.58,3752.75) 2012.25,3752.75 TP1632.1@2040,3725 v1(2572.62,3725)
XSIG240084: D191.1 TP1633.1 U153.10 | length 301.7
  Top Layer w10: D191.1@2777.5,4051.5 v1@2777.5,4115.41 ; v1(2786.03,4115.41) v1@2777.5,4115.41 ; U153.10@2820,4270 2820,4160.71 2777.5,4118.21 v1@2777.5,4115.41
  Bottom Layer w10: TP1633.1@2785,4070 2785,4107.91 2777.5,4115.41 v1(2786.03,4115.41)
XSIG240085: D191.2 TP1634.1 U211.11 | length 1050.1
  Top Layer w10: U211.11@1930,3820 v1(1930,3885.07) ; v1(2692.23,3908.49) 2692.23,4002.73 2702.5,4013 D191.2@2702.5,4051.5
  Bottom Layer w10: v1(1930,3885.07) 1935.07,3885.07 TP1634.1@1970,3920 2082.07,3920 2106.11,3895.96 2313.66,3895.96 2364.8,3844.82 2634.65,3844.82 2692.23,3902.39 v1(2692.23,3908.49)
XSIG240123: C1117.2 Q176.1 R2543.1 R2556.1 TP1853.1 | length 324.4
  Bottom Layer w10: R2543.1@1740,2840 C1117.2@1740,2765 R2556.1@1740,2695 1796.13,2695 1820,2671.13 ; TP1853.1@1820,2700 1820,2671.13 ; Q176.1@1822.5,2611.5 1820.22,2613.78 1820.22,2670.91 1820,2671.13
XSIG240128: D392.1 R2543.2 TP1852.1 | length 288.5
  Bottom Layer w10: R2543.2@1740,2920 1810,2920 TP1852.1@1820,2930 1820,2930.22 1957.56,2930.22 1977.5,2950.16 D392.1@1977.5,2988.5
XSIG240129: C1140.1 D392.3 R2538.2 R2610.1 TP1851.1 | length 318.9
  Bottom Layer w10: TP1851.1@1810,3275 1815,3270 R2538.2@1920,3270 C1140.1@1920,3200 R2610.1@1920,3140 1920,3122.93 1934.27,3108.66 1934.27,3077.23 D392.3@1940,3071.5
XSIG240145: C1127.2 Q169.1 Q202.1 R2350.2 R2527.1 R2671.2 TP1710.1 | length 650.2
  Top Layer w10: R2527.1@2970,4630 2993.14,4630 3000,4636.86 ; Q169.1@2977.5,4781.5 2975.23,4781.5 2975.23,4749.34 2985.21,4739.36 3006.86,4739.36 ; C1127.2@3030,4630 3006.86,4630 3000,4636.86 ; Q202.1@3117.5,4781.5 3117.5,4762.54 3094.31,4739.36 3006.86,4739.36 ; 3000,4636.86 3000,4702.63 3006.86,4709.49 v1(3006.86,4720.34) 3006.86,4739.36
  Bottom Layer w10: TP1710.1@2945,4715 TP1710.1@2950,4715 ; R2350.2@2950,4635 TP1710.1@2950,4715 ; R2671.2@3050,4635 3050,4706.71 3032.67,4724.04 3006.86,4724.04 v1(3006.86,4720.34) 2998.68,4720.34 2993.34,4715 TP1710.1@2950,4715
XSIG240149: C1128.2 Q170.1 Q203.1 R2349.2 R2528.1 R2668.2 TP1711.1 | length 729.2
  Top Layer w10: Q170.1@1677.5,5831.5 1677.5,5805.9 1693.17,5790.22 1703.45,5790.22 ; v1(1708.49,5723.95) v1@1707.19,5723.95 ; R2528.1@1780,5670 C1128.2@1710,5670 1707.19,5670 v1@1707.19,5723.95 ; Q203.1@1817.5,5831.5 1817.5,5806.08 1801.65,5790.22 1703.45,5790.22 ; 1703.45,5790.22 1707.19,5786.48 v1@1707.19,5723.95
  Bottom Layer w10: TP1711.1@1700,5790 v1@1700,5723.95 ; v1(1708.49,5723.95) v1@1700,5723.95 ; R2349.2@1870,5625 R2668.2@1770,5625 1770,5699.68 1754.52,5715.16 1708.79,5715.16 v1@1700,5723.95
XSIG240153: C1129.2 Q171.1 Q204.1 R2348.2 R2529.1 R2678.2 TP1712.1 | length 749.9
  Top Layer w10: R2529.1@1350,5670 C1129.2@1420,5670 v1(1420,5724.47) 1420,5779.93 1426,5785.93 1426,5787 ; Q204.1@1397.5,5831.5 1400.59,5831.5 1400.59,5796.01 1409.6,5787 1426,5787 ; Q171.1@1537.5,5831.5 1535.36,5831.5 1535.36,5793 1529.36,5787 1426,5787
  Bottom Layer w10: TP1712.1@1375,5680 1375,5699.27 1400.19,5724.47 v1(1420,5724.47) 1422.61,5721.86 1461.7,5721.86 1500,5683.56 R2348.2@1500,5625 R2678.2@1610,5625
XSIG240157: C1130.2 Q172.1 Q205.1 R2347.2 R2530.1 R2674.2 TP1850.1 | length 671.5
  Top Layer w10: Q205.1@2697.5,4781.5 2697.5,4737.77 ; v1(2733.37,4691.8) 2725.51,4699.67 2697.5,4699.67 ; C1130.2@2770,4630 R2530.1@2690,4630 2690,4660 2697.5,4667.5 2697.5,4699.67 ; Q172.1@2837.5,4781.5 2837.5,4744.24 2831.04,4737.77 2697.5,4737.77 ; 2697.5,4699.67 2697.5,4737.77
  Bottom Layer w10: TP1850.1@2730,4750 2730,4695.17 v1(2733.37,4691.8) 2733.37,4680.87 2730,4677.5 R2347.2@2730,4635 R2674.2@2830,4635
XSIG240176: C1120.2 Q186.1 R2546.1 R2553.1 TP1714.1 | length 409.2
  Bottom Layer w10: TP1714.1@8855,7415 8908.16,7415 8920,7426.84 R2546.1@8920,7470 8922.91,7472.91 8970,7472.91 ; Q186.1@9002.5,7541.5 8970,7509 8970,7472.91 ; R2553.1@9040,7380 C1120.2@8970,7380 8970,7472.91
XSIG240181: D395.1 R2546.2 TP1715.1 | length 338.5
  Bottom Layer w10: R2546.2@8920,7550 8920,7578.88 8935.14,7594.02 9057.86,7594.02 9067.5,7603.66 D395.1@9067.5,7638.5 9131.21,7638.5 9155,7614.71 TP1715.1@9155,7595
XSIG240182: C1138.1 D395.3 R2533.2 R2541.2 TP1716.1 | length 410.6
  Bottom Layer w10: TP1716.1@8765,7590 8770,7590 8771.42,7588.58 8816.93,7588.58 8820,7585.52 ; R2533.2@8820,7540 8820,7585.52 ; D395.3@9030,7721.5 8991.5,7721.5 R2541.2@8910,7640 8910,7645 C1138.1@8820,7645 8820,7585.52
XSIG240202: R2645.1 TP1849.1 U153.3 | length 212.2
  Top Layer w10: v1(2919.2,4403.05) 2919.2,4469.2 U153.3@2920,4470
  Bottom Layer w10: TP1849.1@2790,4365 2825,4400 R2645.1@2860,4400 2891,4400 2894.05,4403.05 v1(2919.2,4403.05)
XSIG240204: R1130.2 R1904.2 R1905.2 TP1645.1 U151.5 U151.6 | length 599.8
  Top Layer w10: R1130.2@1340,5320 R1905.2@1340,5405 R1904.2@1484.53,5405 ; U151.6@1480,5300 1480,5352.5 1487.04,5359.54 ; R1904.2@1490,5405 R1904.2@1484.53,5405 ; v1(1505.05,5241.53) 1512.29,5241.53 1530,5259.24 U151.5@1530,5300 1523.5,5300 1523.5,5350.03 1513.99,5359.54 1487.04,5359.54 ; R1904.2@1484.53,5405 1484.53,5359.54 1487.04,5359.54
  Bottom Layer w10: TP1645.1@1480,5305 1480,5248.6 1487.07,5241.53 v1(1505.05,5241.53)
XSIG250005: C812.2 R1954.2 R2562.1 TP1253.1 U42.1 | length 635.7
  Top Layer w10: R1954.2@7330,5890 7395.62,5890 7450.77,5834.85 7450.77,5736.68 7429.1,5715 C812.2@7390,5715 7390,5677.5 7370.6,5658.1 v1(7340.24,5658.1) 7340.24,5637.4 7355,5622.64 U42.1@7355,5570
  Bottom Layer w10: TP1253.1@7300,5580 7324.75,5604.75 7324.99,5604.75 7340.24,5620 ; v1(7340.24,5658.1) 7340.24,5620 ; R2562.1@7380,5620 7340.24,5620
XSIG250006: R1475.1 TP1254.1 U42.3 | length 213.7
  Top Layer w10: U42.3@7255,5570 v1(7255,5632.21) 7270,5647.21 R1475.1@7270,5710
  Bottom Layer w10: TP1254.1@7205,5590 7205.58,5590 7247.79,5632.21 v1(7255,5632.21)
XSIG250013: C1053.2 R1546.1 R1575.2 TP1255.1 U42.6 | length 424.8
  Top Layer w10: C1053.2@7160,5265 7160,5278.05 7240,5278.05 R1546.1@7240,5280 7240,5309.78 7255,5324.78 U42.6@7255,5370 7253.74,5370 v1(7253.74,5455.55)
  Bottom Layer w10: v1(7253.74,5455.55) 7254.45,5455.55 TP1255.1@7290,5420 7290,5417.17 7297.17,5410 R1575.2@7380,5410
XSIG250025: R1132.2 R1878.2 R1915.2 TP1635.1 U151.8 U151.9 | length 583.9
  Top Layer w10: R1915.2@1340,4995 R1878.2@1490,4995 1490,5037.5 1480,5047.5 U151.9@1480,5100 1480,5152.08 ; U151.8@1430,5100 1430,5142.17 1439.91,5152.08 1480,5152.08 ; v1(1500,5175.12) 1500,5172.69 1480,5152.69 1480,5152.08
  Bottom Layer w10: R1132.2@1500,5110 R1132.2@1500,5120 ; v1(1500,5175.12) R1132.2@1500,5120 ; TP1635.1@1580,5120 R1132.2@1500,5120
XSIG250031: R1192.2 R1876.2 R1901.2 TP1644.1 U151.12 U151.13 | length 527.3
  Top Layer w10: U151.12@1630,5100 1630,5051.64 1638.56,5043.08 1640,5043.08 ; v1(1660,5164.4) 1673.5,5150.9 U151.13@1673.5,5100 ; U151.13@1680,5100 U151.13@1673.5,5100 ; R1876.2@1790,4995 R1901.2@1640,4995 1640,5043.08 ; 1640,5043.08 1666.58,5043.08 1673.5,5050 U151.13@1673.5,5100
  Bottom Layer w10: R1192.2@1660,5110 v1(1660,5164.4) 1660,5165 TP1644.1@1695,5200
XSIG250037: R1133.2 R1879.2 R1916.2 TP1636.1 U152.5 U152.6 | length 555.8
  Top Layer w10: R1133.2@1990,5320 1990,5394.74 2000,5394.74 R1879.2@2000,5405 2058.68,5405 v1(2072.02,5418.34) 2087.76,5418.34 2101.1,5405 R1916.2@2150,5405 2170,5405 2170,5354.7 ; U152.6@2120,5300 2120,5341.94 2132.76,5354.7 2170,5354.7 ; U152.5@2170,5300 2170,5354.7
  Bottom Layer w10: TP1636.1@2000,5405 2013.34,5418.34 v1(2072.02,5418.34)
XSIG250040: R1191.2 R1874.2 R1900.2 TP1648.1 U152.1 U152.2 | length 523.8
  Top Layer w10: R1874.2@2300,5405 R1874.2@2307.31,5405 ; U152.2@2320,5300 2318.86,5300 2318.86,5350.95 ; U152.1@2370,5300 2363.5,5300 2363.5,5343.11 2355.66,5350.95 2318.86,5350.95 ; R1191.2@2460,5320 2460,5405 R1900.2@2450,5405 2394.46,5405 2393.96,5404.5 v1(2363.96,5404.5) 2363.46,5405 R1874.2@2307.31,5405 ; R1874.2@2307.31,5405 2307.31,5362.5 2318.86,5350.95
  Bottom Layer w10: TP1648.1@2300,5390 2335,5390 2349.5,5404.5 v1(2363.96,5404.5)
XSIG250050: C812.1 D147.3 R1948.2 R1950.2 R1952.2 R1954.1 TP1258.1 U42.2 | length 1036.1
  Top Layer w10: R1950.2@7200,6040 R1952.2@7290,6040 7290,5972.1 7282.8,5972.1 ; U42.2@7305,5570 7305,5681.29 7328.75,5705.04 7328.75,5785 7328.9,5785 ; v1(7368.77,5969.03) v1@7368.77,5970.08 ; C812.1@7390,5785 7328.9,5785 ; R1948.2@7400,6040 7400,5991.42 7378.66,5970.08 v1@7368.77,5970.08 ; 7282.8,5972.1 7282.8,5970.08 v1@7368.77,5970.08 ; 7282.8,5972.1 7280,5972.1 7250,5942.11 R1954.1@7250,5890 7250,5831.97 7256.97,5825 7318.11,5825 7328.9,5814.21 7328.9,5785
  Bottom Layer w10: v1(7368.77,5969.03) 7372.8,5965 TP1258.1@7420,5965 D147.3@7420,6048.5
XSIG250060: R1474.1 TP80.1 U43.3 | length 311.7
  Top Layer w10: v1(5862.92,6280.53) 5867.16,6280.53 5915,6232.69 U43.3@5915,6150
  Bottom Layer w10: TP80.1@5850,6330 5850,6293.45 v1(5862.92,6280.53) 5862.92,6253.25 5906.17,6210 R1474.1@5920,6210
XSIG250068: R1547.1 R1576.2 R2087.2 TP1260.1 U43.6 | length 356.9
  Top Layer w10: R1576.2@5800,6020 5895,6020 5900.96,6014.04 ; R2087.2@5840,5865 5845,5870 R1547.1@5910,5870 5910,5908.12 5915,5913.12 U43.6@5915,5950 5915,6000 5900.96,6014.04 ; v1(5930,6015) 5929.04,6014.04 5900.96,6014.04
XSIG250073: C953.1 D148.3 R1949.2 R1951.2 R1953.2 R1955.1 TP79.1 U43.2 | length 982.1
  Top Layer w10: v1(5949.91,6090) 5955,6090 5965,6100 U43.2@5965,6150
  Bottom Layer w10: C953.1@5760,6015 5807.5,6015 5812.5,6010 R1955.1@5850,6010 5864.59,6010 5944.59,6090 v1(5949.91,6090) R1951.2@6000,6090 6002.5,6090 6050,6137.5 D148.3@6050,6178.5 6050,6182 6053.65,6185.65 6112.74,6185.65 6125.09,6198 6125.09,6264.23 6150.86,6290 R1953.2@6170,6290 TP79.1@6330,6290 R1949.2@6490,6290
XSIG250119: C1122.2 Q163.1 Q196.1 R2536.1 R2675.2 R2676.2 TP1848.1 | length 717.1
  Top Layer w10: R2536.1@1620,4630 C1122.2@1720,4630 ; Q163.1@1677.5,4781.5 1677.5,4753.84 1712.23,4719.11 1712.23,4714.97 ; v1(1767.46,4635.9) 1756.9,4635.9 1751,4630 C1122.2@1720,4630 ; Q196.1@1817.5,4781.5 1817.5,4754.02 1800.48,4737 1734.27,4737 1712.23,4714.97 ; 1712.23,4714.97 1712.23,4670.27 1720,4662.5 C1122.2@1720,4630
  Bottom Layer w10: R2675.2@1660,4715 R2676.2@1760,4715 1760,4643.37 v1(1767.46,4635.9) 1767.46,4572.58 TP1848.1@1770,4570